# Altium PCB Leak Sensor PCB.PcbDoc
Units mm, origin at the board's own origin, x right, y up, seen from the top; angles counter-clockwise.
Board outline 37.2 x 25.2 mm, 2 copper layers (Top Layer, Bottom Layer); 10 components, 6 nets, 26 pads, 11 vias.
Unrouted connection lines stored in the file: 2.
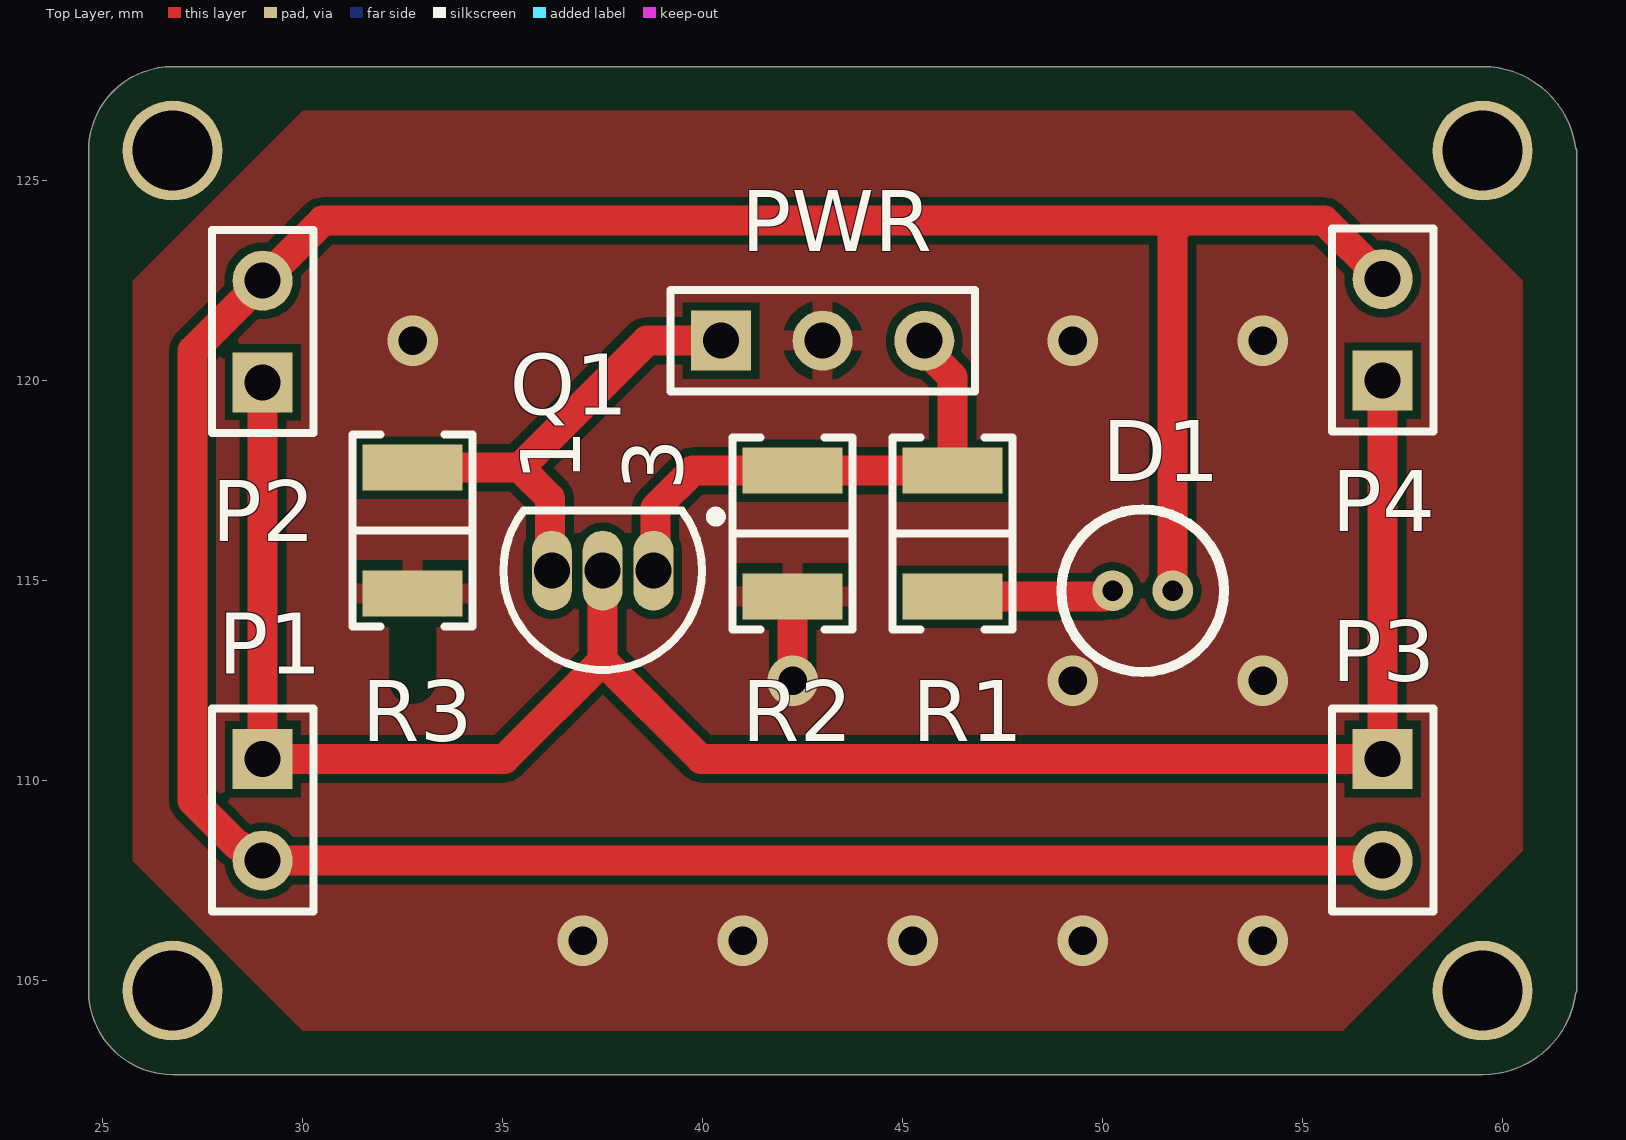
[diagram p0: Top Layer view]
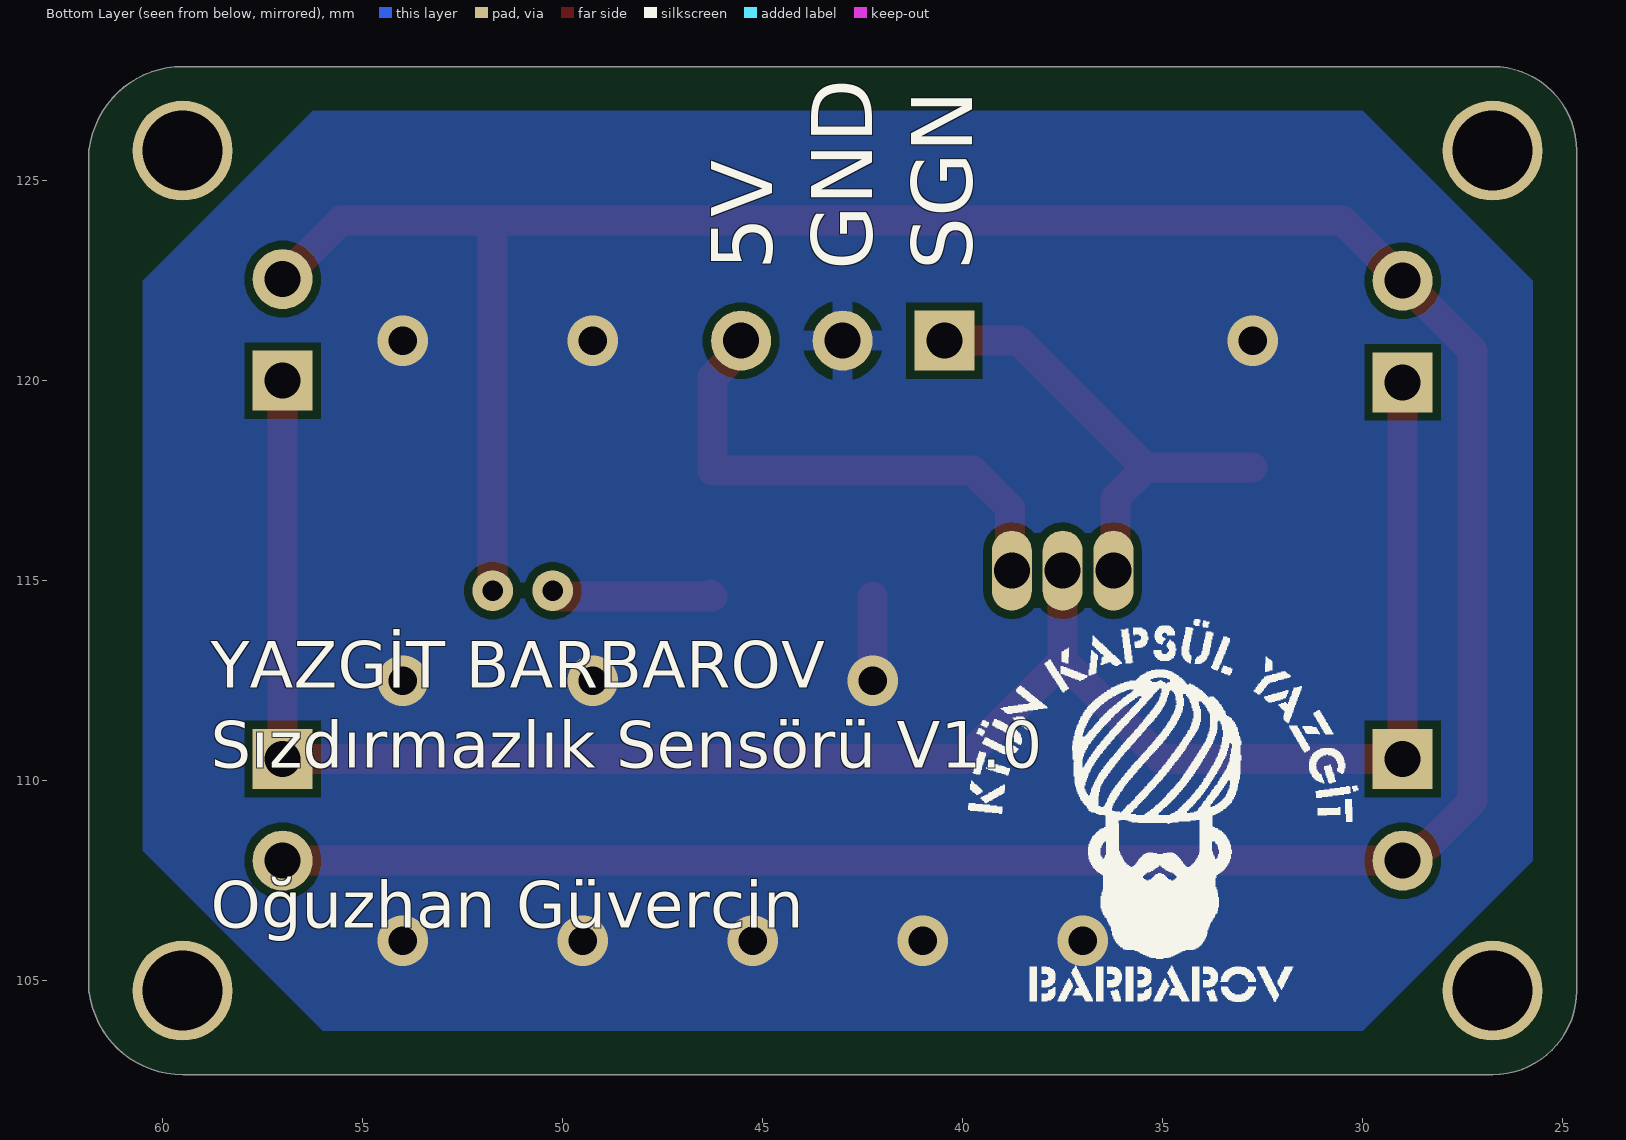
[diagram p1: Bottom Layer view, seen from below]
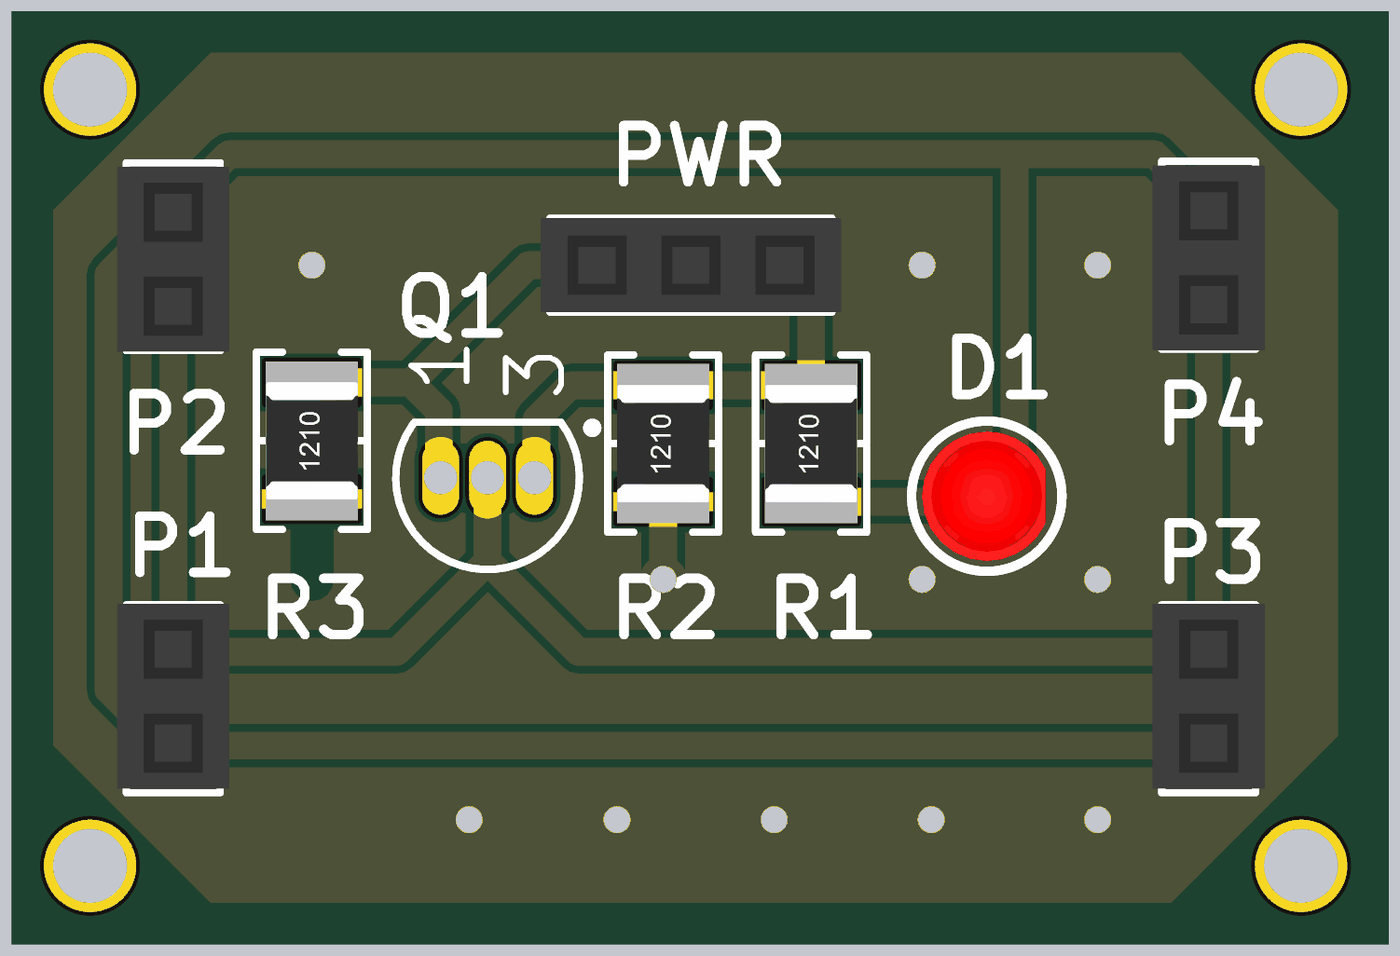
[diagram p2: 3D render of the assembled board from above, using the file's embedded part models]

## Layer stack, top to bottom
Top Solder: solder mask 0.0102, Solder Resist, Dk 3.5
Top Layer: signal copper 0.0356
Dielectric 1: dielectric 0.32, FR-4, Dk 4.8
Bottom Layer: signal copper 0.0356
Bottom Solder: solder mask 0.0102, Solder Resist, Dk 3.5

## Board outline
26.75,102.65 cw(c26.75,104.75) 24.65,104.75 24.65,125.75 cw(c26.75,125.75) 26.75,127.85 59.5,127.85 cw(c59.5,125.5) 61.83,125.811 cw(c61.75,125.75) 61.85,125.75 61.85,104.75 cw(c61.75,104.75) 61.83,104.689 cw(c59.5,105) 59.5,102.65

## Design rules (kind name [scope] priority, off if disabled: settings)
BoardOutlineClearance [All] p1: gap=0.2 ignorepadtopadclearanceinfootprint=FALSE except(0.4: Arc-SplitBarrior Arc-SplitContinuation Track-SplitBarrior Track-SplitContinuation SMDPad-SplitBarrior SMDPad-SplitContinuation THPad-SplitBarrior THPad-SplitContinuation Via-SplitBarrior Via-SplitContinuation Fill-SplitBarrior Fill-SplitContinuation Poly-SplitBarrior Poly-SplitContinuation Region-SplitBarrior Region-SplitContinuation Text-SplitBarrior Text-SplitContinuation)
Clearance "Clearance Bottom Layer" [OnLayer('Bottom Layer')] p1: gap=0.203 ignorepadtopadclearanceinfootprint=TRUE except(0.254: Arc-Text Track-Text SMDPad-Text THPad-Text Via-Text Fill-Text Poly-Text Region-Text Text-Text)
Clearance "Clearance Top Layer" [OnLayer('Top Layer')] p2: gap=0.203 ignorepadtopadclearanceinfootprint=TRUE except(0.254: Arc-Text Track-Text SMDPad-Text THPad-Text Via-Text Fill-Text Poly-Text Region-Text Text-Text)
Clearance [All] p3: gap=0.2 ignorepadtopadclearanceinfootprint=FALSE except(0.089: Arc-Arc Arc-Track Arc-SMDPad Track-Track Track-SMDPad SMDPad-SMDPad; 0.127: Arc-Via Track-Via SMDPad-Via THPad-Via Via-Via; 0.254: Arc-Text Track-Text SMDPad-Text THPad-Text Via-Text Fill-Text Poly-Text Region-Text Text-Text)
HoleSize [All] p1: absolutevalues=TRUE maxlimit=6.3 minlimit=0.2 maxpercent=80.000 minpercent=20.000
MinimumAnnularRing [All] p1: minimumring=0.076
MinimumSolderMaskSliver [All] p1: minsoldermaskwidth=0.1
PolygonConnect PolygonConnect_1 [All] p1: thpad.connectstyle=Relief thpad.reliefconductorwidth=0.508 thpad.reliefentries=4 thpad.polygonreliefangle="90 Angle" thpad.airgapwidth=0.254 smdpad.connectstyle=Relief smdpad.reliefconductorwidth=0.508 smdpad.reliefentries=4 smdpad.polygonreliefangle="90 Angle" smdpad.airgapwidth=0.254 via.connectstyle=Direct via.reliefconductorwidth=0.508 via.reliefentries=4 via.polygonreliefangle="90 Angle" via.airgapwidth=0.254
RoutingCorners [All] p1: cornerstyle=Round minsetback=2.54 maxsetback=2.54
RoutingVias [All] p1: holewidth=0.5 width=1 viastyle="Through Hole" minholewidth=0.2 minwidth=0.45 maxholewidth=1 maxwidth=2
SilkToSilkClearance [All] p1: silktosilkclearance=0.1
SilkToSolderMaskClearance [IsPad] p1: minsilkscreentomaskgap=0.1 clearancetoexposedcopper=TRUE
SolderMaskExpansion [All] p1: expansion=0.102 istentingtop=FALSE
Width [All] p1: maxlimit=2.54 minlimit=0.089 preferedwidth=0.381
25 further rules are at their usual default settings.

## Classes and differential pairs
component class "Leak Sensor Schematic": D1 P2 P4 PWR R1 R2 R3

## Components (designator, comment, footprint, x,y, rotation, side; value= is the part's Value field where it differs from the comment)
D1 "LED" THT_LED 49.75,114.75 r270 top
P1 "Header 2" HDR1X2 29,110.54 r270 top
P2 "Header 2" HDR1X2 29,119.96 r90 top
P3 "Header 2" HDR1X2 57,110.54 r270 top
P4 "Header 2" HDR1X2 57,120 r90 top
PWR "Header 3" HDR1X3 40.46,121 r0 top
Q1 "NPN1" TO-92A 37.5,115.25 r90 top
R1 "100 Ohms" "RES 1210_3225" 46.25,116.175 r90 top
R2 "1 kOhms" "RES 1210_3225" 42.25,116.175 r90 top
R3 "100 Ohms" "RES 1210_3225" 32.75,116.25 r90 top

## Footprints (in the part's own frame and the unit in brackets; to place one, negate y for a bottom-side part, rotate by r counter-clockwise, add the part's x,y. Pads: shape width x height; smd on the part's side, far side on the other; paste and mask are expansions set on the pad)
HDR1X2 [mm] "Connector; Header; 2 Position"
  rect 1.5x1.5 hole 0.9: 1(0,0)
  round 1.5 hole 0.9: 2(2.54,0)
  silkscreen extent -1.27,-1.27 3.81,1.27, body extent -1.3,-1.52 3.7,1.52, height 8.5
HDR1X3 [mm] "Connector; Header; 3 Position"
  rect 1.5x1.5 hole 0.9: 1(0,0)
  round 1.5 hole 0.9: 2(2.54,0) 3(5.08,0)
  silkscreen extent -1.27,-1.27 6.35,1.27, body extent -1.52,-1.27 6.6,1.27, height 8.51
"RES 1210_3225" [mm] "Chip Resistor, 2-Leads, Body 3.1x2.6mm, IPC Medium Density"
  rect 1.15x2.5 smd: 1(-1.575,0) 2(1.575,0)
  silkscreen extent -2.4,-1.5 2.4,1.5, body extent -1.6,-1.25 1.6,1.25, height 0.7
THT_LED [mil]
  round 40 hole 20: 1(0,19.68) 2(0,78.74)
  silkscreen extent -80,-31 80,129, body extent -69,-20 69,111, height 178
TO-92A [mm] "TO, Flat Index; 3 In-Line, Axial Leads; Body Dia. 4.5mm; Leads 0.51 x 0.48 mm (max)"
  oval 2x1 hole 0.9: 1(0,-1.27) 2(0,0) 3(0,1.27)
  silkscreen extent -2.48,-2.96 1.5,2.48, body extent -2.48,-2.5 1.5,2.5, height 6.86

## Part data
D1: library part "5mm THT LED"
P1 P2 P3 P4: "Header, 2-Pin", LatestRevisionDate=17-Jul-2002, LatestRevisionNote="Re-released for DXP Platform.", Publisher="Altium Limited"
PWR: "Header, 3-Pin", LatestRevisionDate=17-Jul-2002, LatestRevisionNote="Re-released for DXP Platform.", Publisher="Altium Limited"
Q1: "NPN Bipolar Transistor", Code_JEDEC=TO-92, DatasheetVersion=1989, LatestRevisionDate=17-Jul-2002, LatestRevisionNote="Re-released for DXP Platform.", PackageDescription="TO, Flat Index; 3 In-Line, Axial Leads; Body Dia. 4.6mm; Leads 0.41 x 0.39 mm (max)", PackageReference=TO-92, PackageVersion=1989, Published=8-Jun-2000, Publisher="Altium Limited"
R1 R3: library part RMCF1210JT100R, "RES 100 OHM 5% 1/2W 1210", Device Package="1210 (3225 Metric)", Manufacturer="Stackpole Electronics Inc", Operating Temperature="-55°C ~ 155°C", Power (Watts)="0.5W, 1/2W", Ratings=AEC-Q200, Supplier Device Package=1210, Supplier Part Number 1=RMCF1210JT100RCT-ND, Temperature Coefficient=±200ppm/°C, Tolerance=±5%, ComponentLink1Description=Datasheet, ComponentLink1URL=https://www.seielect.com/catalog/sei-rmcf_rmcp.pdf, ComponentLink2Description="DigiKey Link", ComponentLink2URL=http://digikey.com/product-detail/en/stackpole-electronics-inc/RMCF1210JT100R/RMCF1210JT100RCT-ND/1942845, Composition="Thick Film", Features="Automotive AEC-Q200", Height - Seated (Max)="0.028\" (0.70mm)", LastUpdated="2.09.2020 01:26:23", Lifecycle Status=Active, Minimum Order=1, Number of Terminations=2, Package / Case="1210 (3225 Metric)", Packaging=TapeAndReel, Part Number=RMCF1210JT100R, Part Status=Active, Price=0.01, Resistance="100 Ohms", Series=RMCF, Size / Dimension="0.126\" L x 0.098\" W (3.20mm x 2.50mm)", Supplier 1=DigiKey
R2: library part RMCF1210JT1K00, "RES 1K OHM 5% 1/3W 1210", Device Package="1210 (3225 Metric)", Manufacturer="Stackpole Electronics Inc", Operating Temperature="-55°C ~ 155°C", Power (Watts)="0.333W, 1/3W", Ratings=AEC-Q200, Supplier Device Package=1210, Supplier Part Number 1=RMCF1210JT1K00CT-ND, Temperature Coefficient=±200ppm/°C, Tolerance=±5%, ComponentLink1Description=Datasheet, ComponentLink1URL=https://www.seielect.com/catalog/sei-rmcf_rmcp.pdf, ComponentLink2Description="DigiKey Link", ComponentLink2URL=http://digikey.com/product-detail/en/stackpole-electronics-inc/RMCF1210JT1K00/RMCF1210JT1K00CT-ND/1942858, Composition="Thick Film", Features="Automotive AEC-Q200", Height - Seated (Max)="0.028\" (0.70mm)", LastUpdated="2.09.2020 01:26:23", Lifecycle Status=Active, Minimum Order=1, Number of Terminations=2, Package / Case="1210 (3225 Metric)", Packaging=TapeAndReel, Part Number=RMCF1210JT1K00, Part Status=Active, Price=0.01, Resistance="1 kOhms", Series=RMCF, Size / Dimension="0.126\" L x 0.098\" W (3.20mm x 2.50mm)", Supplier 1=DigiKey

## Free pads (board coordinates)
  round 2.5 hole 2: 17(26.75,125.75) 18(59.5,125.75) 19(59.5,104.75) 20(26.75,104.75)

## Via types
v1: diameter 1.27/1.27 (per signal layer), hole 0.711, Top Layer to Bottom Layer, tented both sides, 10 vias
v2: diameter 1.27, hole 0.711, Top Layer to Bottom Layer, tented both sides, 1 vias

## Nets (pads, with @x,y where several pads share a name; then routed paths per layer and width w, separated by ;. In a path a pad name is that pad's centre, name@x,y a point inside that pad or via, vN(x,y) a via of type N, cw(c..) or ccw(c..) an arc to the next point about the centre after c; other vN are vias at no path point)
+5: PWR.3 Q1.1 R1.2 R2.2 | length 13
  Top Layer w0.75: Q1.1 38.818,115.298 38.818,116.818 39.75,117.75 R2.2 R1.2 46.25,120.087 45.54,120.797 PWR.3
GND: PWR.2 R2.1 R3.1 | length 2.1
  Top Layer w0.75: v2(42.25,112.5) R2.1
  other v1: 37,106 41,106 45.25,106 49.5,106 54,106 49.25,112.5 54,112.5 32.75,121 49.25,121 54,121
NetD1_1: D1.1 R1.1 | length 4.1
  Top Layer w0.75: R1.1@46.3,114.65 R1.1 50.028,114.6 50.178,114.75 D1.1
NetD1_2: D1.2 P1.2 P2.2 P3.2 P4.2 | length 82.7
  Top Layer w0.75: D1.2 51.75,123.75 52,124 ; P3.2 28.797,108 28.422,108.375 28.375,108.375 27.25,109.5 27.25,120.75 P2.2 30.5,124 52,124 ; P4.2 55.54,124 52,124
NetP1_1: P1.1 P2.1 P3.1 P4.1 Q1.2 | length 51.2
  Top Layer w0.75: P2.1 P1.1 35.04,110.54 37.5,113 ; Q1.2 37.5,113 ; P4.1 P3.1 39.96,110.54 37.5,113
NetPWR_1: PWR.1 Q1.3 R3.2 | length 11.9
  Top Layer w0.75: R3.2 35.425,117.825 ; Q1.3 36.182,115.298 36.182,117.068 35.425,117.825 ; PWR.1 38.6,121 35.425,117.825

## Polygon pours and split planes (outlines as drawn)
GND on Bottom Layer "GND_L02_P001" (solid, pour order 1): 25.75,122.5 30,126.75 56.25,126.75 60.5,122.5 60.5,108.25 56,103.75 30,103.75 25.75,108
GND on Top Layer "GND_L01_P000" (solid, pour order 0): 25.75,122.5 30,126.75 56.25,126.75 60.5,122.5 60.5,108.25 56,103.75 30,103.75 25.75,108

## Silkscreen, mask and mechanical layers (free items; w line width, h text height)
Bottom Overlay:
  drawing of 60 lines, arcs and shapes, not listed
  text "SGN" at 39.754,122.754 h1.52 r270
  text "GND" at 42.254,122.754 h1.52 r270
  text "5V" at 44.754,122.754 h1.52 r270
  text "YAZGİT BARBAROV / Sızdırmazlık Sensörü V1.0 /  / Oğuzhan Güvercin" at 58.799,105.933 h2
Mechanical 1:
  lines w0.2: 61.75,104.75 61.75,125.75 ; 61.75,105 cw(c59.5,105) 59.5,102.75 26.75,102.75 cw(c26.75,104.75) 24.75,104.75 24.75,125.75 cw(c26.75,125.75) 26.75,127.75 59.5,127.75 cw(c59.5,125.5) 61.75,125.5

## Text inside footprints (layer, text, board x,y; h text height)
Q1: Top Overlay "1" at 36.94,117.474 h1.5 r90; Top Overlay "3" at 39.5,117.25 h1.5 r90